# EAGLE board PLACA Minael (EAGLE 6.6.0)
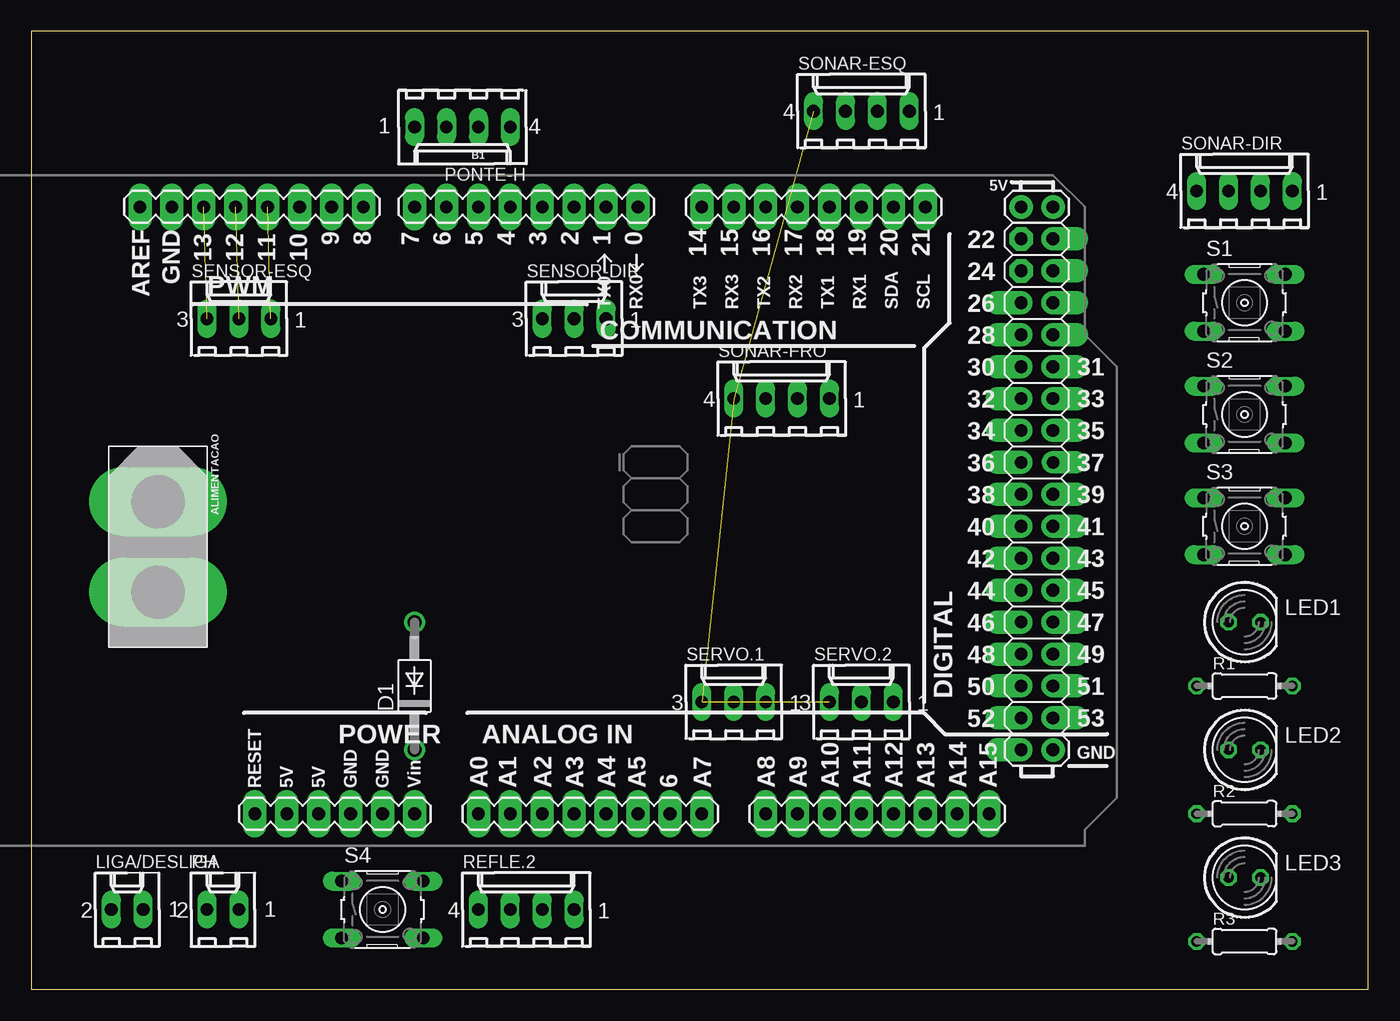
[diagram p0: board, top side]
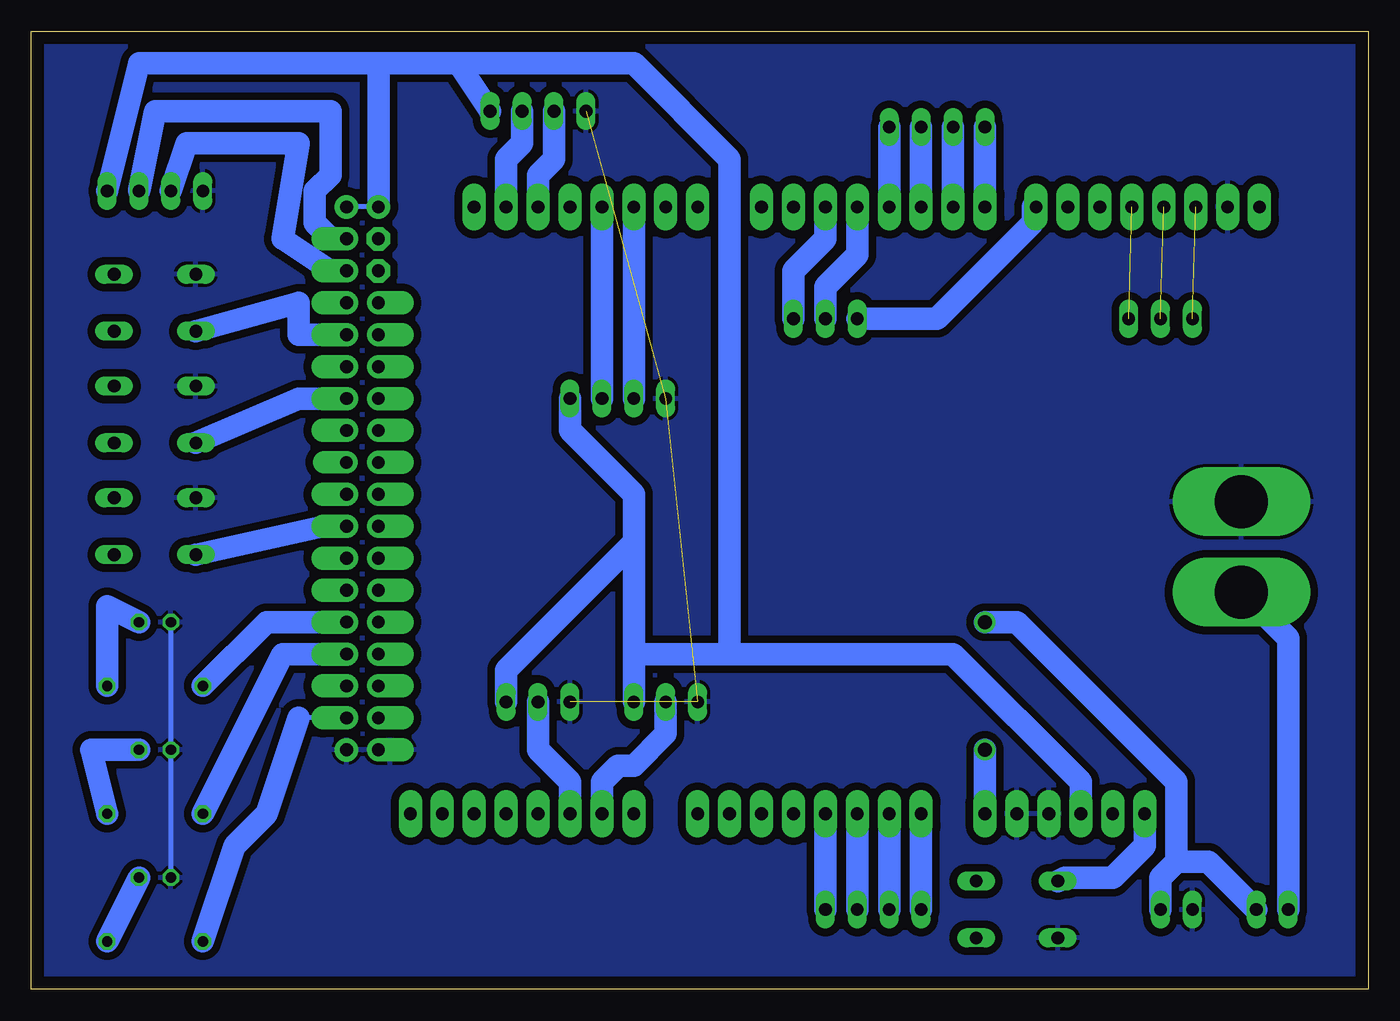
[diagram p1: board, bottom side, seen from below]

Size 106.35 x 76.19 mm. Coordinates in mm from the lower left corner, seen from the top.
Outline: 0,0 106.35,0 106.35,76.19 0,76.19 0,0
Copper layers (1*16): Top 0.035mm / dielectric 1.5mm / Bottom 0.035mm
Design rules "default *": minimum track width 70mil, minimum drill 24mil, track to track 24mil, track to pad 24mil, pad to pad 24mil, via to via 24mil, smd to smd 8mil, copper to edge 40mil, drill to drill 8mil, minimum pad ring 10mil, minimum via ring 8mil, stop-mask expansion 4mil, vias tented up to drill 0mil, thermal gap 10mil

## Footprints (pad centres in the part's own frame; a part is rotated, then mirrored left to right if it is on the bottom)
XT60 = drill 4.2 pad 5.5 long: + 6.51,-1.35; - -0.69,-1.35
ARDUINO_MEGA = drill 1.016 pad 1.88 long: 0 13.97,24.13; 1 11.43,24.13; 2 8.89,24.13; 3 6.35,24.13; 3.3V -13.97,-24.13; 4 3.81,24.13; 5 1.27,24.13; 5V@0 -11.43,-24.13; 6 -1.27,24.13; 7 -3.81,24.13; 8 -7.874,24.13; 9 -10.414,24.13; 10 -12.954,24.13; 11 -15.494,24.13; 12 -18.034,24.13; 13 -20.574,24.13; 14 19.05,24.13; 15 21.59,24.13; 16 24.13,24.13; 17 26.67,24.13; 18 29.21,24.13; 19 31.75,24.13; 20 34.29,24.13; 21 36.83,24.13; A0 1.27,-24.13; A1 3.81,-24.13; A2 6.35,-24.13; A3 8.89,-24.13; A4 11.43,-24.13; A5 13.97,-24.13; A6 16.51,-24.13; A7 19.05,-24.13; A8 24.13,-24.13; A9 26.67,-24.13; A10 29.21,-24.13; A11 31.75,-24.13; A12 34.29,-24.13; A13 36.83,-24.13; A14 39.37,-24.13; A15 41.91,-24.13; AREF -25.654,24.13; GND@0 -8.89,-24.13; GND@1 -6.35,-24.13; GND@4 -23.114,24.13; RESET -16.51,-24.13; VIN -3.81,-24.13 | drill 1.016 pad 1.88: 5V@1 44.45,24.13; 5V@2 46.99,24.13; GND@3 46.99,-19.05 | drill 1.016 pad 1.88 octagon: 22 44.45,21.59; 24 44.45,19.05 | drill 1.016 pad 1.88 offset: 23 46.99,21.59; 25 46.99,19.05; 26 44.45,16.51; 27 46.99,16.51; 28 44.45,13.97; 29 46.99,13.97; 30 44.45,11.43; 31 46.99,11.43; 32 44.45,8.89; 33 46.99,8.89; 34 44.45,6.35; 35 46.99,6.35; 36 44.45,3.81; 38 44.45,1.27; 39 46.99,1.27; 40 44.45,-1.27; 41 46.99,-1.27; 42 44.45,-3.81; 43 46.99,-3.81; 44 44.45,-6.35; 45 46.99,-6.35; 46 44.45,-8.89; 47 46.99,-8.89; 48 44.45,-11.43; 49 46.99,-11.43; 50 44.45,-13.97; 51 46.99,-13.97; 52 44.45,-16.51; 53 46.99,-16.51; GND@2 44.45,-19.05 | drill 1 pad 1.778 offset: 37 46.99,3.81
DO41-10 = drill 1.118: A 5.08,0; C -5.08,0
LED5MM = drill 0.813 octagon: A -1.27,0; K 1.27,0
6410-02 = drill 1.016 long: 1 1.27,0; 2 -1.27,0
6410-04 = drill 1.016 long: 1 3.81,0; 2 1.27,0; 3 -1.27,0; 4 -3.81,0
0204/7 = drill 0.813 octagon: 1 -3.81,0; 2 3.81,0
B3F-10XX = drill 1.016 long: 1 -3.251,2.261; 2 3.251,2.261; 3 -3.251,-2.261; 4 3.251,-2.261
6410-03 = drill 1.016 long: 1 2.54,0; 2 0,0; 3 -2.54,0

## Placement (x,y rotation side)
ALIMENTACAO  [XT60]  11.43,38.1 270 top
B1  ARDUINO_MEGA_R3FULL  [ARDUINO_MEGA]  34.29,38.1 0 top
D1  [DO41-10]  30.48,24.13 90 top
LED1  [LED5MM]  96.52,29.21 0 top
LED2  [LED5MM]  96.52,19.05 0 top
LED3  [LED5MM]  96.52,8.89 0 top
LIGA/DESLIGA  [6410-02]  7.62,6.35 0 top
PH  [6410-02]  15.24,6.35 0 top
PONTE-H  [6410-04]  34.29,68.58 180 top
R1  [0204/7]  96.52,24.13 0 top
R2  [0204/7]  96.52,13.97 0 top
R3  [0204/7]  96.52,3.81 0 top
REFLE.2  [6410-04]  39.37,6.35 0 top
S1  [B3F-10XX]  96.52,54.61 0 top
S2  [B3F-10XX]  96.52,45.72 0 top
S3  [B3F-10XX]  96.52,36.83 0 top
S4  [B3F-10XX]  27.94,6.35 0 top
SENSOR-DIR  [6410-03]  43.18,53.34 0 top
SENSOR-ESQ  [6410-03]  16.51,53.34 0 top
SERVO.1  [6410-03]  55.88,22.86 0 top
SERVO.2  [6410-03]  66.04,22.86 0 top
SONAR-DIR  [6410-04]  96.52,63.5 0 top
SONAR-ESQ  [6410-04]  66.04,69.85 0 top
SONAR-FRO  [6410-04]  59.69,46.99 0 top

## Library data of the parts
ALIMENTACAO = Robotica-IFRN-SC-conectores
B1 = Robotica-IFRN-SC-Arduino
D1 = diode
LED1-LED3 = led
LIGA/DESLIGA PH PONTE-H REFLE.2 SENSOR-DIR SENSOR-ESQ SERVO.1 SERVO.2 SONAR-DIR SONAR-ESQ SONAR-FRO = Robotica-IFRN-SC-conectores; OC_FARNELL: unknown; OC_NEWARK: unknown
R1-R3 = rcl
S1-S4 = switch-omron; MPN: B3F-1000; OC_FARNELL: 176432; OC_NEWARK: 36M3542

## Nets
+5V: B1.5V@0 B1.5V@1 B1.5V@2 SERVO.1.1 SERVO.2.1 SONAR-DIR.1 SONAR-ESQ.1 SONAR-FRO.1
GND: ALIMENTACAO.- B1.GND@0 B1.GND@1 B1.GND@2 B1.GND@3 B1.GND@4 LED1.A LED2.A LED3.A PH.2 S1.1 S2.1 S3.1 S4.3 SERVO.1.3 SERVO.2.3 SONAR-DIR.4 SONAR-ESQ.4 SONAR-FRO.4
N$1: B1.A3 REFLE.2.1
N$2: B1.A2 REFLE.2.2
N$3: B1.A1 REFLE.2.3
N$4: B1.A0 REFLE.2.4
N$5: B1.16 SONAR-FRO.3
N$6: B1.17 SONAR-FRO.2
N$7: B1.7 PONTE-H.1
N$8: B1.6 PONTE-H.2
N$9: B1.5 PONTE-H.3
N$10: B1.4 PONTE-H.4
N$11: B1.20 SONAR-ESQ.2
N$12: B1.19 SONAR-ESQ.3
N$13: B1.23 SONAR-DIR.2
N$14: B1.25 SONAR-DIR.3
N$15: B1.11 SENSOR-ESQ.1
N$16: B1.12 SENSOR-ESQ.2
N$17: B1.13 SENSOR-ESQ.3
N$18: B1.2 SENSOR-DIR.1
N$19: B1.3 SENSOR-DIR.2
N$20: B1.8 SENSOR-DIR.3
N$21: B1.A10 SERVO.2.2
N$22: B1.A9 SERVO.1.2
N$23: B1.29 S1.3
N$24: B1.33 S2.3
N$25: B1.41 S3.3
N$26: B1.53 R3.1
N$27: B1.49 R2.1
N$28: B1.47 R1.1
N$29: LED1.K R1.2
N$30: LED2.K R2.2
N$31: LED3.K R3.2
N$32: B1.VIN D1.C
N$33: ALIMENTACAO.+ LIGA/DESLIGA.2
N$34: B1.RESET S4.1
VDD: D1.A LIGA/DESLIGA.1 PH.1

## Tracks (layer width: path | path; a pad name or v marks a point on that pad's centre or on a via)
+5V
  Bottom 0.406: B1.5V@1 B1.5V@2
  Bottom 1.778: 58.42,35.56 58.42,39.37 63.5,44.45 SONAR-FRO.1 | 58.42,35.56 58.42,26.67 | 58.42,26.67 SERVO.1.1 | SERVO.2.1 68.58,25.4 58.42,35.56 | B1.5V@0 22.86,16.51 33.02,26.67 50.8,26.67 | 58.42,26.67 50.8,26.67 | 72.39,73.66 58.42,73.66 50.8,66.04 50.8,26.67 | B1.5V@1 78.74,73.66 | 78.74,73.66 97.79,73.66 SONAR-DIR.1 | 78.74,73.66 72.39,73.66 | 72.39,73.66 SONAR-ESQ.1
GND  (3 unrouted)
  Bottom 0.406: LED1.A LED2.A LED3.A
  pour Bottom: 0,76.2 1.27,0 106.68,1.27 106.68,76.2
N$1
  Bottom 1.778: B1.A3 REFLE.2.1
N$2
  Bottom 1.778: B1.A2 REFLE.2.2
N$3
  Bottom 1.778: B1.A1 REFLE.2.3
N$4
  Bottom 1.778: B1.A0 REFLE.2.4
N$5
  Bottom 1.778: B1.16 SONAR-FRO.3
N$6
  Bottom 1.778: B1.17 SONAR-FRO.2
N$7
  Bottom 1.778: B1.7 PONTE-H.1
N$8
  Bottom 1.778: B1.6 PONTE-H.2
N$9
  Bottom 1.778: B1.5 PONTE-H.3
N$10
  Bottom 1.778: B1.4 PONTE-H.4
N$11
  Bottom 1.778: SONAR-ESQ.2 67.31,67.31 68.58,66.04 B1.20
N$12
  Bottom 1.778: SONAR-ESQ.3 64.77,66.04 66.04,64.77 B1.19
N$13
  Bottom 0.406: B1.23 82.55,59.69
  Bottom 1.778: 82.55,59.69 83.82,60.96 83.82,63.5 82.55,64.77 82.55,69.85 96.52,69.85 SONAR-DIR.2
N$14
  Bottom 1.778: B1.25 82.55,57.15 86.36,59.69 85.09,67.31 93.98,67.31 SONAR-DIR.3
N$15  (1 unrouted)
N$16  (1 unrouted)
N$17  (1 unrouted)
N$18
  Bottom 1.778: SENSOR-DIR.1 45.72,57.15 43.18,59.69 B1.2
N$19
  Bottom 1.778: SENSOR-DIR.2 43.18,55.88 40.64,58.42 B1.3
N$20
  Bottom 1.778: SENSOR-DIR.3 34.29,53.34 26.67,60.96 26.67,62.23 B1.8
N$21
  Bottom 1.778: SERVO.2.2 66.04,19.05 63.5,16.51 B1.A10
N$22
  Bottom 1.778: SERVO.1.2 55.88,20.32 58.42,17.78 59.69,17.78 60.96,16.51 B1.A9
N$23
  Bottom 1.778: B1.29 85.09,52.07 85.09,54.61 S1.3
N$24
  Bottom 1.778: B1.33 85.09,46.99 S2.3
N$25
  Bottom 0.406: B1.41 83.11,36.83
  Bottom 1.778: 83.11,36.83 S3.3
N$26
  Bottom 0.406: B1.53 85.09,21.59
  Bottom 1.778: 85.09,21.59 87.63,13.97 90.17,11.43 R3.1
N$27
  Bottom 1.778: R2.1 86.36,26.67 B1.49
N$28
  Bottom 1.778: B1.47 87.63,29.21 R1.1
N$29
  Bottom 1.778: R1.2 100.33,30.48 LED1.K
N$30
  Bottom 1.778: R2.2 101.6,19.05 LED2.K
N$31
  Bottom 1.778: LED3.K R3.2
N$32
  Bottom 1.778: D1.C B1.VIN
N$33
  Bottom 1.778: LIGA/DESLIGA.2 6.35,27.94 8.89,30.48 ALIMENTACAO.+
N$34
  Bottom 1.778: B1.RESET 17.78,11.43 20.32,8.89 24.13,8.89 S4.1
N$35
  pour Bottom: 0,76.2 0,0 106.68,0 106.68,76.2
VDD
  Bottom 1.778: LIGA/DESLIGA.1 12.7,10.16 15.24,10.16 | 15.24,10.16 16.51,8.89 PH.1 | D1.A 27.94,29.21 15.24,16.51 15.24,10.16